# Altium PCB LM5161_Buck_PCB.PcbDoc (part 2 of 2)
Units mm, origin at the board's own origin, x right, y up, seen from the top; angles counter-clockwise.
Board outline 45.09 x 26.42 mm, 2 copper layers (Top Layer, Bottom Layer); 30 components, 16 nets, 70 pads, 9 vias.
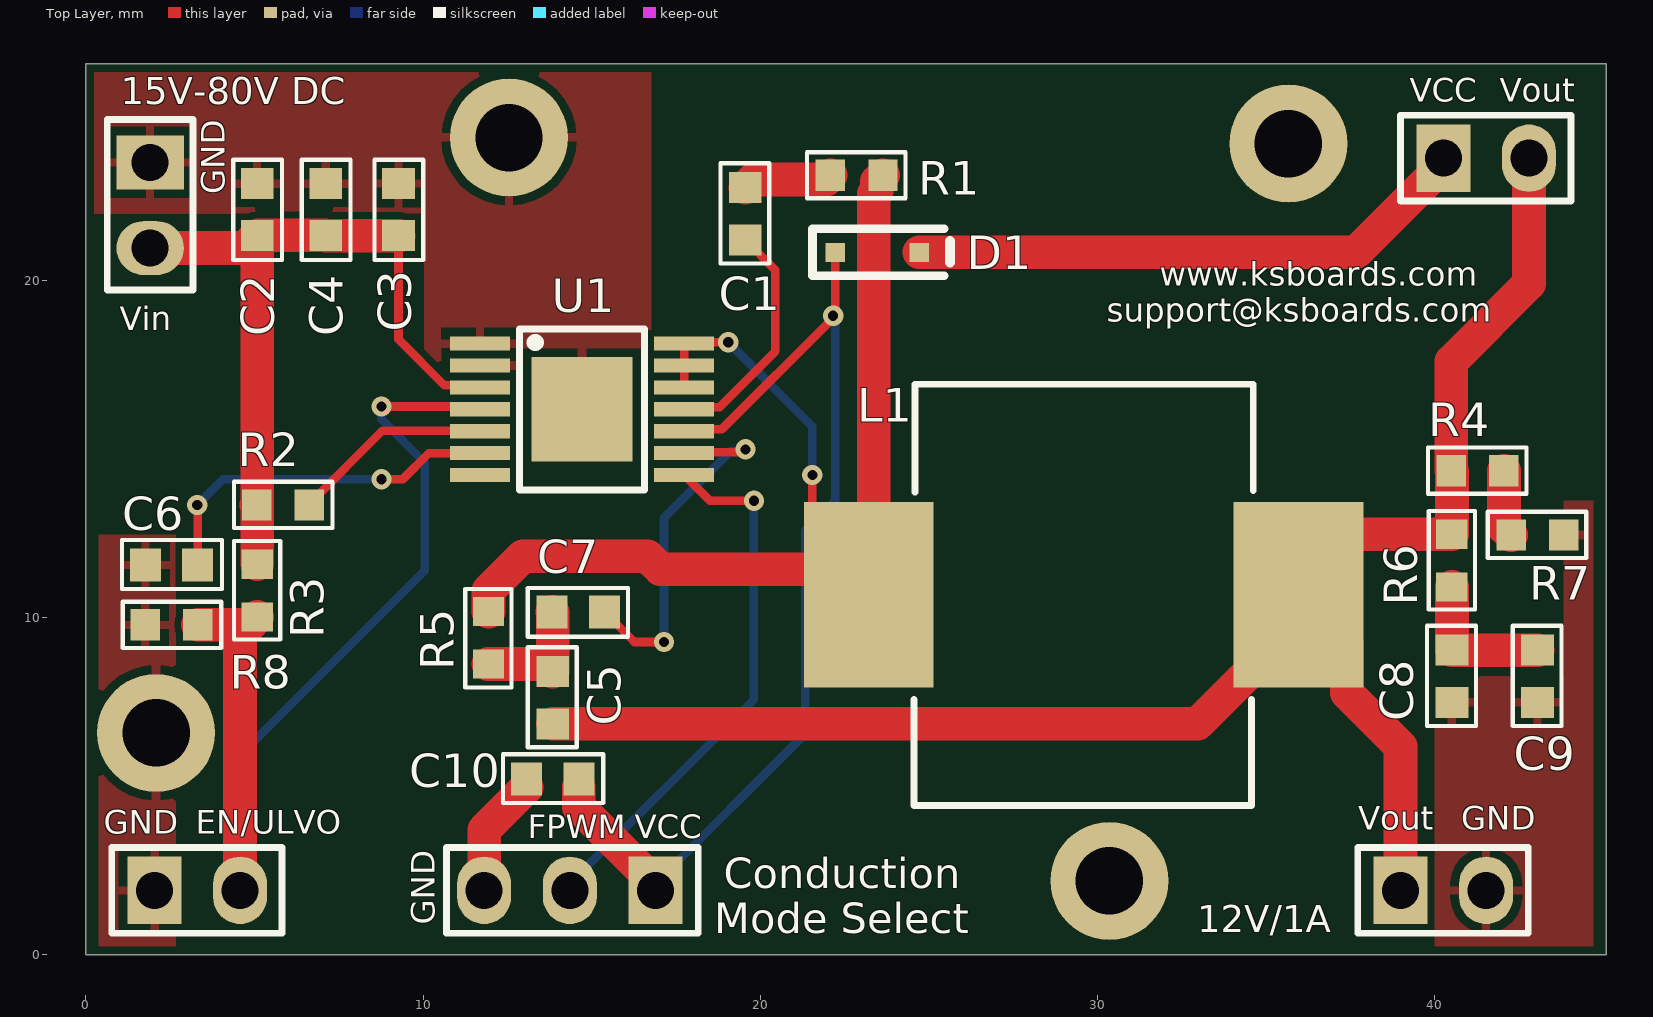
[diagram p0: Top Layer view]

## Part data (continued)
R7: library part CRCW06032K00FKEA, "D11/CRCW0603 100 2K 1% ET1 e3", Case Code (Imperial)=0603, Case Code (Metric)=1608, Manufacturer=Vishay, Max Operating Temperature=155°C, Max Power Dissipation=100mW, Min Operating Temperature=-55°C, Package Quantity=10, Resistance=2kR, Resistance Tolerance=1%, Resistor Type="Thick Film", Supplier Part Number 1=541-2.00KHCT-ND, Temperature Coefficient=100ppm/°C, Voltage Rating=75V, Case/Package=0603, Category="Chip SMD Resistors", ComponentLink1Description=https://datasheet.ciiva.com/7673/1720486-7673525.pdf?src-supplier=Element14, ComponentLink1URL=https://datasheet.ciiva.com/7673/1720486-7673525.pdf?src-supplier=Element14, ComponentLink2Description=https://datasheet.ciiva.com/28621/125364-28621397.pdf?src-supplier=Element14, ComponentLink2URL=https://datasheet.ciiva.com/28621/125364-28621397.pdf?src-supplier=Element14, ComponentLink3Description=https://datasheet.ciiva.com/3257/dcrcwe3-3257366.pdf?src-supplier=Avnet, ComponentLink3URL=https://datasheet.ciiva.com/3257/dcrcwe3-3257366.pdf?src-supplier=Avnet, ComponentLink4Description=https://datasheet.ciiva.com/3257/dcrcwe3-3257367.pdf?src-supplier=Avnet, ComponentLink4URL=https://datasheet.ciiva.com/3257/dcrcwe3-3257367.pdf?src-supplier=Avnet, ComponentLink5Description=https://datasheet.ciiva.com/16882/dcrcw-16882855.pdf?src-supplier=Avnet+Europe, ComponentLink5URL=https://datasheet.ciiva.com/16882/dcrcw-16882855.pdf?src-supplier=Avnet+Europe, ComponentLink6Description=https://datasheet.ciiva.com/5551/dcrcwe3-109170-5551994.pdf?src-supplier=Mouser, ComponentLink6URL=https://datasheet.ciiva.com/5551/dcrcwe3-109170-5551994.pdf?src-supplier=Mouser, ComponentLink7Description=https://datasheet.ciiva.com/16755/70201119-16755770.pdf?src-supplier=Allied+Electronics, ComponentLink7URL=https://datasheet.ciiva.com/16755/70201119-16755770.pdf?src-supplier=Allied+Electronics, ComponentLink8Description=https://datasheet.ciiva.com/26314/fld-crcw-e3-data-en-26314682.pdf?src-supplier=Distrelec, ComponentLink8URL=https://datasheet.ciiva.com/26314/fld-crcw-e3-data-en-26314682.pdf?src-supplier=Distrelec, ComponentLink9Description=https://datasheet.ciiva.com/2465/dcrcwe3-2465564.pdf?src-supplier=Digi-Key, ComponentLink9URL=https://datasheet.ciiva.com/2465/dcrcwe3-2465564.pdf?src-supplier=Digi-Key, ComponentLink10Description=https://datasheet.ciiva.com/16765/70201119-16765388.pdf?src-supplier=Allied+Electronics, ComponentLink10URL=https://datasheet.ciiva.com/16765/70201119-16765388.pdf?src-supplier=Allied+Electronics, ComponentLink11Description=https://datasheet.ciiva.com/2465/dcrcwe3-2465565.pdf?src-supplier=Digi-Key, ComponentLink11URL=https://datasheet.ciiva.com/2465/dcrcwe3-2465565.pdf?src-supplier=Digi-Key, ComponentLink12Description=https://datasheet.ciiva.com/2465/dcrcwe3-2465566.pdf?src-supplier=Digi-Key, ComponentLink12URL=https://datasheet.ciiva.com/2465/dcrcwe3-2465566.pdf?src-supplier=Digi-Key, Construction=Rectangular, Contact Plating=Tin,Lead, Depth=0.85mm, Features="Automotive AEC-Q200", Height=0.45mm, Lead Free="Lead Free", Length=1.55mm, Manufacturer Part Number=CRCW06032K00FKEA, Military Standard=Not, Mount="Surface Mount", Number of Pins=2, Number of Terminations=2, Packaging="Tape and Reel", Power Rating=100mW, Pricing 1="1=0,10000, 10=0,03400, 100=0,01390, 1000=0,00624, 2500=0,00542 (USD)", Radiation Hardening=No, REACH SVHC=Unknown, RoHS=Yes, RoHS Compliant=Yes, Series=CRCW, Size Code=0603, Stock 1=244384, Supplier 1=Digi-Key, Technology="THICK FILM", Termination=Solder, Tolerance=1%, Voltage Rating (DC)=75V, Weight=7.1E-05oz, Width=0.85mm
R8: library part RC0603FR-076K81L, "RES SMD 6.81K OHM 1% 1/10W 0603", Case Code (Imperial)=0603, Case Code (Metric)=1608, Manufacturer=Yageo, Max Operating Temperature=155°C, Max Power Dissipation=100mW, Min Operating Temperature=-55°C, Resistance=6.81kR, Resistor Type="Thick Film", Supplier Part Number 1=311-6.81KHRCT-ND, Temperature Coefficient=100ppm/°C, Tolerance=1%, Voltage Rating=50V, Case/Package=0603, Category="Chip SMD Resistors", ComponentLink1Description=https://datasheet.ciiva.com/15189/getdatasheetpartid-331153-15189810.pdf?src-supplier=Verical, ComponentLink1URL=https://datasheet.ciiva.com/15189/getdatasheetpartid-331153-15189810.pdf?src-supplier=Verical, Construction=Rectangular, Depth=0.8mm, Features="Moisture Resistant", Lead Free="Lead Free", Length=1.6mm, Manufacturer Part Number=RC0603FR-076K81L, Military Standard=Not, Number of Terminations=2, Packaging="Tape and Reel", Power Rating=100mW, Pricing 1="1=0,10000, 10=0,02400, 100=0,00970, 1000=0,00436, 2500=0,00378 (USD)", RoHS=Yes, RoHS Compliant=Yes, Series=RC, Size Code=0603, Stock 1=635161, Supplier 1=Digi-Key, Termination=SMD/SMT, Voltage Rating (DC)=50V
U1: "IC REG BCK FLYBCK ISO 14HTSSOP", Manufacturer="Texas Instruments", Max Input Voltage=100V, Max Operating Temperature=125°C, Max Output Voltage=92V, Min Input Voltage=4.5V, Min Operating Temperature=-40°C, Min Output Voltage=2V, Output Current=1A, Quiescent Current=2.3mA, Supplier Part Number 1=296-47265-1-ND, Switching Frequency=1MHz, Category="Voltage Regulators - Switching", ComponentLink1Description=http://www.ti.com/lit/ds/symlink/lm5161.pdf?src-supplier=Digi-Key, ComponentLink1URL=http://www.ti.com/lit/ds/symlink/lm5161.pdf?src-supplier=Digi-Key, Lead Free="Lead Free", Manufacturer Part Number=LM5161PWPR, Mount="Surface Mount", Number of Outputs=1, Output Type=Adjustable, Packaging="Tape and Reel", Pricing 1="1=4,45000, 10=3,99600, 25=3,77800, 100=3,10620, 250=2,78720, 500=2,68646, 1000=2,23312 (USD)", RoHS=Yes, RoHS Compliant=Yes, Stock 1=1170, Supplier 1=Digi-Key, Synchronous Rectifier=Yes, Topology=Flyback

## Via types
v1: diameter 0.6, hole 0.3, Top Layer to Bottom Layer, 9 vias

## Nets (pads, with @x,y where several pads share a name; then routed paths per layer and width w, separated by ;. In a path a pad name is that pad's centre, name@x,y a point inside that pad or via, vN(x,y) a via of type N, cw(c..) or ccw(c..) an arc to the next point about the centre after c; other vN are vias at no path point)
GND: C2.1 C3.1 C4.1 C6.1 C8.1 C9.1 C10.1 Conduction.3 EN/ULVO.1 JP3.2 MH1.1 MH2.1 MH3.1 MH4.1 R7.1 R8.1 U1.1 U1.2 U1.15 Vin.1 | length 3.6
  Top Layer w1: Conduction.3 11.811,3.696 C10.1@13.068,4.953
NetC1_1: C1.1 U1.11 | length 7.1
  Top Layer w0.254: U1.11 17.803,16.233 18.792,16.233 20.447,17.888 20.447,20.307 C1.1
NetC1_2: C1.2 R1.2 | length 2.7
  Top Layer w1: C1.2 19.799,22.987 21.953,22.987 R1.2
NetC2_2: C2.2 C3.2 C4.2 R2.1 R3.2 U1.3 Vin.2 | length 23.4
  Top Layer w0.254: C3.2 9.271,18.248 10.636,16.883 11.625,16.883 U1.3
  Top Layer w1: Vin.2 4.712,20.955 C2.2 ; R3.2 5.08,13.317 R2.1 5.08,13.353 5.08,20.955 C2.2 ; C3.2 C4.2 7.099,21.336 5.093,21.336 C2.2
NetC5_1: C5.1 JP1.2 JP3.1 L1.2 R4.2 R6.2 | length 51.8
  Top Layer w1: C5.1 32.968,6.845 35.966,9.843 L1.2 ; JP3.1 38.989,6.169 37.391,7.767 37.391,9.243 L1.2 ; JP1.2 42.799,19.9 40.495,17.596 R4.2 40.513,14.333 R6.2 37.391,12.464 35.966,11.039 L1.2
NetC5_2: C5.2 C7.2 R5.2 | length 3.8
  Top Layer w1: R5.2 13.62,8.618 C5.2 13.843,10.147 C7.2
NetC6_2: C6.2 U1.6 | length 10.8
  Top Layer w0.254: v1(3.302,13.335) 3.315,13.322 C6.2 ; v1(8.763,14.097) 9.398,14.097 10.175,14.874 U1.6
  Bottom Layer w0.254: v1(3.302,13.335) 4.064,14.097 v1(8.763,14.097)
NetC7_1: C7.1 U1.9 | length 10.9
  Top Layer w0.254: C7.1 15.38,10.135 15.713,9.802 15.738,9.802 16.269,9.271 v1(17.145,9.271) ; U1.9 17.775,14.905 19.477,14.905 v1(19.558,14.986)
  Bottom Layer w0.254: v1(17.145,9.271) 17.145,12.954 19.14,14.949 19.521,14.949 v1(19.558,14.986)
NetC8_2: C8.2 C9.2 R6.1 | length 4.4
  Top Layer w1: R6.1 C8.2 C9.2
NetC10_2: C10.2 Conduction.1 D1.2 U1.10 | length 31
  Top Layer w0.254: U1.10 17.803,15.583 18.86,15.583 22.162,18.885 v1(22.162,18.948) ; v1@22.225,18.948 D1.2
  Top Layer w1: C10.2@14.618,4.953 14.618,4.378 16.891,2.105 Conduction.1
  Bottom Layer w0.254: Conduction.1 16.891,2.105 21.336,6.55 21.336,12.573 22.225,13.462 22.225,18.885 v1(22.162,18.948)
NetD1_1: D1.1 JP1.1 | length 16.8
  Top Layer w1: D1.1 37.665,20.828 40.259,23.422 JP1.1
NetJP4_2: EN/ULVO.2 R3.1 R8.2 U1.4 | length 30
  Top Layer w0.254: v1(8.763,16.256) 9.017,16.256 11.602,16.256 U1.4
  Top Layer w1: R8.2 R3.1@4.844,9.779 ; EN/ULVO.2 4.572,9.507 R3.1@4.844,9.779 ; R3.1 R3.1@4.844,9.779
  Bottom Layer w0.254: EN/ULVO.2 4.572,5.914 10.055,11.396 10.055,14.583 8.763,15.875 v1(8.763,16.256)
NetJP5_2: Conduction.2 U1.8 | length 16.2
  Top Layer w0.254: U1.8 18.506,13.462 v1(19.812,13.462)
  Bottom Layer w0.254: Conduction.2 14.351,2.105 19.812,7.566 v1(19.812,13.462)
NetR2_2: R2.2 U1.5 | length 6
  Top Layer w0.254: R2.2 6.622,13.365 8.797,15.54 11.668,15.54 U1.5
NetR4_1: R4.1 R7.2 | length 2
  Top Layer w1: R4.1 42.055,12.664 R7.2
SW: L1.1 R1.1 R5.1 U1.12 U1.13 U1.14 | length 36.2
  Top Layer w0.254: U1.12 U1.13 U1.14 17.781,18.161 v1(19.05,18.161) ; v1(21.544,14.224) 21.544,12.34 L1.1@22.454,11.43
  Top Layer w1: R5.1 11.938,10.795 12.954,11.811 16.662,11.811 17.043,11.43 22.454,11.43 L1.1 23.368,10.82 23.368,22.557 23.455,22.644 23.455,22.929 R1.1
  Bottom Layer w0.254: v1(19.05,18.161) 21.544,15.667 v1(21.544,14.224)
pads on no net: U1.7

## Polygon pours and split planes (outlines as drawn)
GND on Top Layer "GND_L01_P004" (solid, remove dead copper, pour order 4): 43.833,8.255 40.005,8.255 40.005,0.254 44.704,0.254 44.704,13.462 43.833,13.462
GND on Top Layer "GND_L01_P001" (solid, remove dead copper, pour order 1): 10.112,21.971 10.033,21.892 10.033,17.145 16.764,17.145 16.764,26.162 0.254,26.162 0.254,21.971
GND on Top Layer "GND_L01_P002" (solid, remove dead copper, pour order 2): 2.667,12.446 0.381,12.446 0.381,0.254 2.667,0.254
GND on Bottom Layer "GND_L02_P000" (solid, remove dead copper, pour order 0): 0.254,26.162 44.704,26.162 44.704,0.127 0.508,0.127 0.254,0.381

## Silkscreen, mask and mechanical layers (free items; w line width, h text height)
Top Overlay:
  text "VCC" at 39.266,25.296 h0.7
  text "Vout" at 41.933,25.296 h0.7
  text "15V-80V DC" at 1.038,25.219 h0.8
  text "www.ksboards.com" at 31.848,19.834 h0.7
  text "support@ksboards.com" at 30.274,18.772 h0.7
  text "Vout" at 37.742,3.706 h0.7
  text "GND" at 40.79,3.706 h0.7
  text "FPWM" at 13.104,3.452 h0.7
  text "VCC" at 16.279,3.452 h0.7
  text "GND" at 10.34,0.887 h0.7 r90
  text "12V/1A" at 32.966,0.657 h0.8
Bottom Overlay:
  text "www.ksboards.com" at 34.573,20.698 h1.5
  text "support@ksboards.com" at 36.147,6.11 h1.5

## Text inside footprints (layer, text, board x,y; h text height)
Conduction: Top Overlay "Mode Select" at 18.64,0.632 h0.9
EN/ULVO: Top Overlay "GND" at 0.531,3.579 h0.7
Vin: Top Overlay "GND" at 4.117,22.553 h0.7 r90